# Allegro board MICROMOUSE_SHIELD.brd
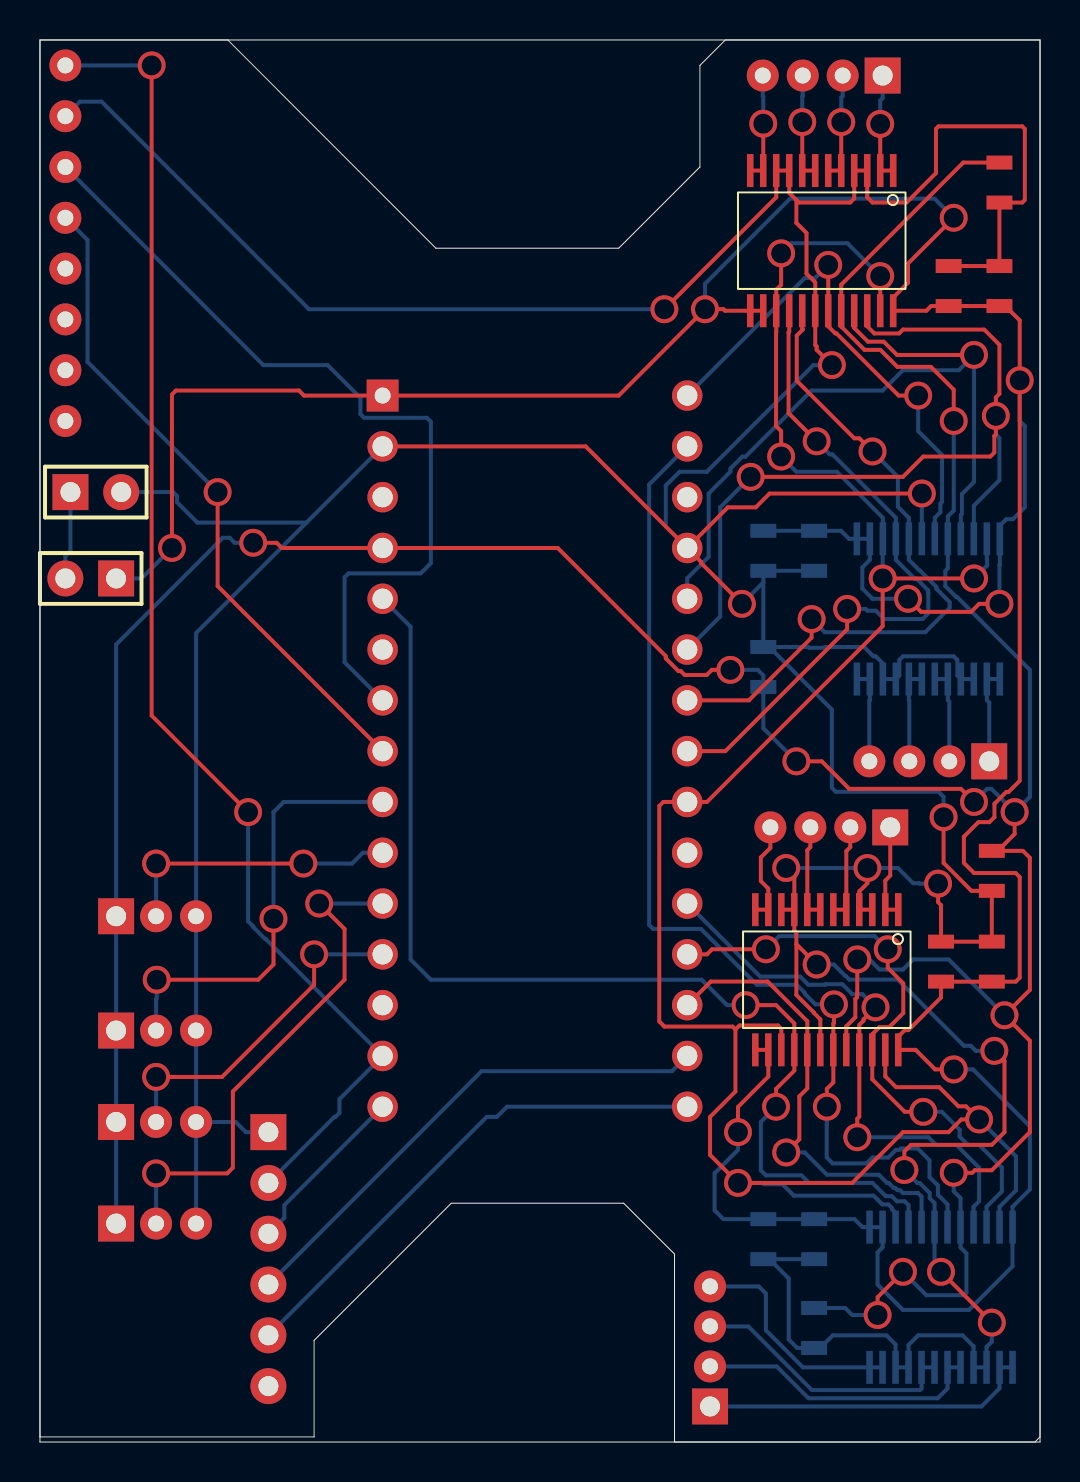
[diagram p0: board, top side]
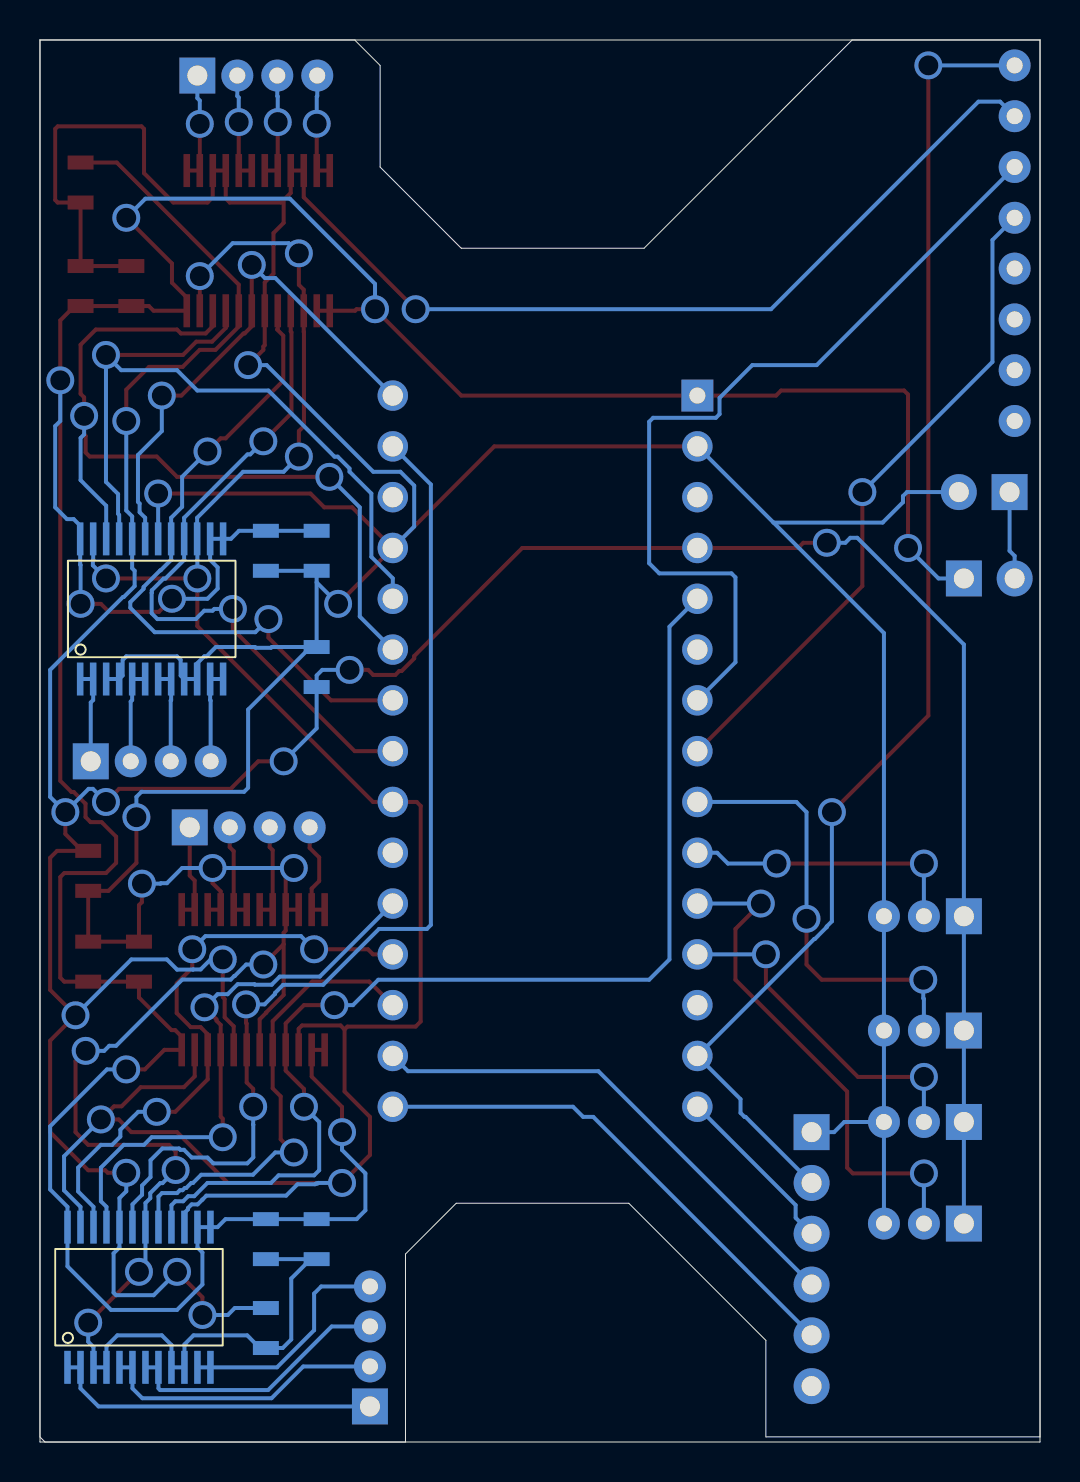
[diagram p1: board, bottom side, seen from below]

Outline 50.04 x 70.1 mm; copper layers: TOP, BOTTOM. Coordinates in mm from the lower left corner of the outline.
Outline path: 0,70.1 0,0.25 13.72,0.25 13.72,5.08 20.57,11.94 29.21,11.94 31.75,9.4 31.75,0 49.78,0 50.04,0.25 50.04,70.1 ; 0,70.1 0,0 50.04,0 50.04,70.1 ; 0,70.1 9.4,70.1 19.81,59.69 28.96,59.69 33.02,63.75 33.02,68.83 34.29,70.1 50.04,70.1 ; 0,70.1 50.04,70.1

## Placement (name value [footprint] x y rotation side)
C1  100n  [0805SMD]  48.01 61.98 90 top
C2  100n  [0805SMD]  48.01 58.8 270 top
C3  10u  [0805SMD]  45.47 58.8 270 top
C4  100n  [0805SMD]  45.08 25.02 270 top
C5  10u  [0805SMD]  47.62 25.02 270 top
C6  100n  [0805SMD]  47.62 27.56 90 top
C7  100n  [0805SMD]  36.19 39.75 270 bottom
C8  100n  [0805SMD]  36.19 43.56 90 bottom
C9  10u  [0805SMD]  38.73 43.56 90 bottom
C10  100n  [0805SMD]  36.19 9.14 90 bottom
C11  10u  [0805SMD]  38.73 9.14 90 bottom
C12  100n  [0805SMD]  38.73 4.7 90 bottom
G1  Gyro  [GYROEB]  1.27 68.83 0 top
J1  -  [CON_1X2]  3.81 43.18 180 top
J2  -  [CON_1X2]  1.52 47.5 0 top
J4  -  [CON_1X4_RM2]  42.16 68.33 180 top
J5  -  [CON_1X4_RM2]  47.5 34.04 180 bottom
J6  -  [CON_1X4_RM2]  42.54 30.73 180 top
J7  -  [CON_1X4_RM2]  33.53 1.78 90 top
J8  -  [CON_1X3_RM2]  3.81 16 0 top
J9  -  [CON_1X3_RM2]  3.81 10.92 0 top
J10  -  [CON_1X3_RM2]  3.81 26.29 0 top
J11  -  [CON_1X3_RM2]  3.81 20.57 0 top
U2  TB6612  [SSOP24]  39.12 60.07 270 top
U4  Nucleo L011K4  [NUCLEO32]  17.14 52.32 0 top
U5  TB6612  [SSOP24]  44.45 41.66 90 bottom
U6  TB6612  [SSOP24]  39.37 23.11 270 top
U7  TB6612  [SSOP24]  45.08 7.24 90 bottom
U8  -  [CON_1X6]  11.43 15.49 270 top

## Library data of the parts
C1-C12 = c: User Part Number: C**
G1 = Gyro: User Part Number: ***
J1 J2 = CON_1X2: User Part Number: ***
J4-J7 = CON_1X4_RM2: User Part Number: ***
J8-J11 = CON_1X3_RM2: User Part Number: ***
U2 U5-U7 = TB6612: Tolerance: ***; User Part Number: ***
U4 = NUCLEO-L011K4
U8 = CON_1X6: User Part Number: ***

## Footprints (pads in the part's own frame, mm; a bottom-side part is the same pattern mirrored in y, then rotated)
0805SMD
  rect 0.7x1.3 smd: 1(0,0) 2(2,0)
CON_1X2
  rect 1.8x1.8 hole 1: 1(0,0)
  round 1.8 hole 1: 2(2.54,0)
CON_1X3_RM2
  rect 1.8x1.8 hole 1: 1(0,0)
  round 1.6 hole 0.8: 2(2,0) 3(4,0)
CON_1X4_RM2
  rect 1.8x1.8 hole 1: 1(0,0)
  round 1.6 hole 0.8: 2(2,0) 3(4,0) 4(6,0)
CON_1X6
  rect 1.8x1.8 hole 1: 1(0,0)
  round 1.8 hole 1: 2(2.54,0) 3(5.08,0) 4(7.62,0) 5(10.16,0) 6(12.7,0)
GYROEB
  round 1.6 hole 0.8: 1(0,0) 2(0,-2.54) 3(0,-5.08) 4(0,-7.62) 5(0,-10.16) 6(0,-12.7) 7(0,-15.24) 8(0,-17.78)
NUCLEO32
  rect 1.6x1.6 hole 0.8: 1(0,0)
  round 1.524 hole 1.016: 2(0,-2.54) 3(0,-5.08) 4(0,-7.62) 5(0,-10.16) 6(0,-12.7) 7(0,-15.24) 8(0,-17.78) 9(0,-20.32) 10(0,-22.86) 11(0,-25.4) 12(0,-27.94) 13(0,-30.48) 14(0,-33.02) 15(0,-35.56) 16(15.24,-35.56) 17(15.24,-33.02) 18(15.24,-30.48) 19(15.24,-27.94) 20(15.24,-25.4) 21(15.24,-22.86) 22(15.24,-20.32) 23(15.24,-17.78) 24(15.24,-15.24) 25(15.24,-12.7) 26(15.24,-10.16) 27(15.24,-7.62) 28(15.24,-5.08) 29(15.24,-2.54) 30(15.24,0)
SSOP24
  rect 1.651x0.33 smd: 1(-3.505,3.576) 2(-3.505,2.926) 3(-3.505,2.276) 4(-3.505,1.626) 5(-3.505,0.975) 6(-3.505,0.325) 7(-3.505,-0.325) 8(-3.505,-0.975) 9(-3.505,-1.626) 10(-3.505,-2.276) 11(-3.505,-2.926) 12(-3.505,-3.576) 13(3.505,-3.576) 14(3.505,-2.926) 15(3.505,-2.276) 16(3.505,-1.626) 17(3.505,-0.975) 18(3.505,-0.325) 19(3.505,0.325) 20(3.505,0.975) 21(3.505,1.626) 22(3.505,2.276) 23(3.505,2.926) 24(3.505,3.576)

## Nets
+3V3: G1.1(VCC) U4.14(+3V3) U8.2
+5V: C1.2 C6.2 C7.2 C12.2 J8.1 J9.1 J10.1 J11.1 U2.20(V20) U4.4(+5V) U5.20(V20) U6.20(V20) U7.20(V20)
GND: C1.1 C2.1 C3.1 C4.1 C5.1 C6.1 C7.1 C8.1 C9.1 C10.1 C11.1 C12.1 G1.2(GND) J2.2 J8.3 J9.3 J10.3 J11.3 U2.3(V3) U2.4(V4) U2.9(V9) U2.10(V10) U2.18(V18) U4.2(GND) U4.27(GND2) U5.3(V3) U5.4(V4) U5.9(V9) U5.10(V10) U5.18(V18) U6.3(V3) U6.4(V4) U6.9(V9) U6.10(V10) U6.18(V18) U7.3(V3) U7.4(V4) U7.9(V9) U7.10(V10) U7.18(V18) U8.1
VIN: C2.2 C3.2 C4.2 C5.2 C8.2 C9.2 C10.2 C11.2 J1.1 U2.13(V13) U2.14(V14) U2.24(V24) U4.1(VIN) U5.13(V13) U5.14(V14) U5.24(V24) U6.13(V13) U6.14(V14) U6.24(V24) U7.13(V13) U7.14(V14) U7.24(V24)
A0: J8.2 U4.12(A0)
A1: J9.2 U4.11(A1)
A2: J10.2 U4.10(A2)
A3: J11.2 U4.9(A3)
A4: G1.4(SDA) U4.8(A4)
A5: G1.3(SCL) U4.7(A5)
A6: U4.6(A6)
A7: U4.5(A7) U6.16(V16) U7.16(V16)
AREF: U4.13(AREF)
D0: U4.29(D0) U6.19(V19) U7.19(V19)
D1: U2.19(V19) U4.30(D1) U5.19(V19)
D2: U2.21(V21) U4.26(D2) U5.21(V21)
D3: U2.22(V22) U4.25(D3) U5.22(V22)
D4: U2.17(V17) U4.24(D4) U5.17(V17)
D5: U2.16(V16) U4.23(D5) U5.16(V16)
D6: U2.15(V15) U2.23(V23) U4.22(D6) U5.15(V15) U5.23(V23) U6.15(V15) U6.23(V23) U7.15(V15) U7.23(V23)
D7: U4.21(D7)
D8: U4.20(D8) U6.21(V21) U7.21(V21)
D9: U4.19(D9) U6.22(V22) U7.22(V22)
D10: U4.18(D10) U6.17(V17) U7.17(V17)
D11: U4.17(D11) U8.4
D12: U4.16(D12) U8.5
D13: U4.15(D13) U8.3
RST: U4.3(RST)
RST2: U4.28(RST2)
N08659: J1.2 J2.1
N17689: J4.1 U2.1(V1) U2.2(V2)
N17721: J4.2 U2.5(V5) U2.6(V6)
N17737: J4.3 U2.7(V7) U2.8(V8)
N17765: J4.4 U2.11(V11) U2.12(V12)
N26053: J5.1 U5.1(V1) U5.2(V2)
N26081: J5.2 U5.5(V5) U5.6(V6)
N26093: J5.3 U5.7(V7) U5.8(V8)
N26117: J5.4 U5.11(V11) U5.12(V12)
N26865: J6.1 U6.1(V1) U6.2(V2)
N26893: J6.2 U6.5(V5) U6.6(V6)
N26905: J6.3 U6.7(V7) U6.8(V8)
N26929: J6.4 U6.11(V11) U6.12(V12)
N27704: J7.1 U7.1(V1) U7.2(V2)
N27732: J7.2 U7.5(V5) U7.6(V6)
N27744: J7.3 U7.7(V7) U7.8(V8)
N27768: J7.4 U7.11(V11) U7.12(V12)

Pads without a net: G1 5 6 7 8; U8 6

## Via types
v1: diameter 1.4, hole 1, TOP to BOTTOM, 73 vias

## Routing (per net, layer and track width the routed paths; a pad name or vN(x,y) marks a point on that pad's centre or on a via; arc(x,y) is an arc through that point)
+3V3: length 67.4
  TOP w0.2: v1(10.41,31.5) 5.59,36.32 v1(5.59,68.83)
  BOTTOM w0.2: G1.1 v1(5.59,68.83) ; U8.2 14.73,16.26 14.79,16.26 14.99,16.46 14.99,17.15 U4.14 11.3,25.15 11.27,25.15 10.67,25.74 10.67,25.78 10.41,26.03 v1(10.41,31.5)
+5V: length 180.5
  TOP w0.2: v1(40.89,24.13) 40.89,22.37 40.89,22.36 40.89,22.24 40.8,22.15 40.8,21.24 40.35,20.79 U6.20 ; 47.92,29.56 48.77,30.4 v1(48.77,31.5) ; 47.92,29.56 49.18,29.56 49.53,29.21 49.53,22.61 v1(48.26,21.34) 49.53,20.07 49.53,15.49 47.62,13.59 46.77,13.59 46.65,13.46 v1(45.72,13.46) ; 47.92,29.56 C6.2 ; v1(46.74,32) 46.08,32.66 40.49,32.66 39.12,34.04 v1(37.85,34.04) ; C1.2 46.2,63.98 40.09,57.87 U2.20 40.09,55.77 41.26,54.61 42.05,54.61 42.9,53.76 44.58,53.76 45.72,52.62 v1(45.72,51.05) ; v1(10.67,44.96) 11.84,44.96 12.1,44.7 U4.4 25.91,44.7 31.31,39.3 31.31,39.18 31.94,38.55 32.06,38.55 32.26,38.35 33.36,38.35 33.62,38.61 v1(34.54,38.61) ; v1(43.18,8.51) 41.91,7.24 v1(41.91,6.35)
  BOTTOM w0.2: v1(34.54,38.61) 35.91,38.61 36.19,38.33 C7.2 36.19,35.69 v1(37.85,34.04) ; v1(10.67,44.96) 9.74,44.96 9.49,45.21 9.14,45.21 3.81,39.88 J10.1 J11.1 J8.1 J9.1 ; C12.2 40.29,6.7 40.64,6.35 v1(41.91,6.35) ; v1(43.18,8.51) 44.35,7.34 46.23,7.34 46.35,7.47 46.35,9.43 46.06,9.73 U7.20 46.06,12.19 45.72,12.53 v1(45.72,13.46) ; v1(46.74,32) 47.39,32.66 47.6,32.66 v1(48.77,31.5) 49.53,32.26 49.53,38.61 45.89,42.25 45.84,42.25 45.3,42.8 45.3,43.56 45.43,43.69 U5.20 45.43,46.28 45.72,46.58 v1(45.72,51.05) ; v1(40.89,24.13) 41.5,24.13 42,23.63 42.37,23.63 42.38,23.62 43.18,23.62 43.69,24.13 45.47,24.13 v1(48.26,21.34)
GND: length 317.7
  TOP w0.2: U6.18 39.04,21.14 38.72,21.46 38.72,21.48 37.85,22.35 37.85,24.89 ; v1(31.24,56.64) 36.84,62.24 U2.10 U2.9 37.49,62.46 37.85,62.1 ; U4.27 34.42,46.74 35.81,46.74 36.5,47.43 v1(44.12,47.43) ; U4.27 33.08,44 33.08,43.95 v1(35.12,41.91) ; U4.27 27.3,49.78 U4.2 ; v1(47.75,19.56) 48.26,19.05 48.26,15.49 47.62,14.86 43.58,14.86 43.25,14.53 v1(43.25,13.6) ; v1(41.4,28.7) 41.4,27.94 41,27.53 U6.4 U6.3 ; v1(45.08,8.51) v1(47.62,5.97) ; v1(45.21,31.24) 45.21,28.96 46.61,27.56 C6.1 C5.1 C4.1 45.08,26.84 44.94,26.99 v1(44.94,27.92) ; U6.9 37.74,28.3 v1(37.34,28.7) ; U6.9 37.74,25.57 37.85,25.47 37.85,24.89 ; U6.9 U6.10 ; 37.85,62.1 37.97,61.98 40.54,61.98 40.74,62.18 U2.4 U2.3 41.39,62.24 41.66,61.98 43.36,61.98 44.83,63.44 44.83,65.66 44.96,65.79 49.15,65.79 49.28,65.66 49.28,62.1 49.15,61.98 C1.1 C2.1 C3.1 ; 37.85,62.1 37.85,60.96 38.35,60.45 38.35,58.42 38.79,57.98 U2.18 38.79,54.85 38.86,54.78 38.86,54.61 v1(39.62,53.85) ; 37.85,24.89 v1(38.86,23.88)
  BOTTOM w0.2: 13.33,45.97 U4.2 ; 13.33,45.97 7.87,45.97 6.86,46.99 6.86,47.3 6.66,47.5 J2.2 ; 13.33,45.97 7.81,40.45 J10.3 J11.3 J8.3 ; v1(31.24,56.64) 13.46,56.64 3.08,67.02 2,67.02 G1.2 ; U5.3 U5.4 45.9,38.33 45.9,39.1 45.72,39.29 43.18,39.29 43,39.1 43,38.33 U5.9 U5.10 42.17,38.93 41.82,39.29 41.7,39.29 41.24,39.75 39.28,39.75 39.25,39.71 38.48,39.71 38.44,39.75 36.49,39.75 ; J8.3 9.79,16 10.3,15.49 U8.1 ; J8.3 J9.3 ; v1(45.08,8.51) 44.76,8.83 U7.18 44.76,11.95 44.52,12.19 44.52,12.45 44.02,12.94 43.91,12.94 v1(43.25,13.6) ; 35.89,39.75 C7.1 ; C7.1 36.19,42.98 ; C7.1 36.49,39.75 ; U5.18 v1(44.12,47.43) ; C10.1 36.49,9.14 ; 36.49,9.14 C11.1 ; 36.49,9.14 37.47,8.17 37.47,5.13 37.89,4.7 C12.1 39.03,4.7 39.67,5.33 42.35,5.33 42.81,4.88 U7.10 U7.9 43.46,4.85 43.94,5.33 46.16,5.33 46.71,4.79 U7.4 U7.3 47.36,4.75 47.62,5.01 v1(47.62,5.97) ; v1(47.75,19.56) 46.82,19.56 46.57,19.81 46.23,19.81 42.92,23.12 40.5,23.12 40.32,23.3 40.29,23.3 39.72,23.88 v1(38.86,23.88) ; 36.19,42.98 C8.1 C9.1 ; 36.19,42.98 v1(35.12,41.91) ; v1(45.21,31.24) 45.21,32.26 44.96,32.51 39.82,32.51 39.62,32.71 39.62,36.62 36.49,39.75 ; v1(44.94,27.92) 44.01,27.92 43.99,27.94 43.69,27.94 42.93,28.7 v1(41.4,28.7) v1(37.34,28.7) ; U4.27 31.31,45.78 31.31,47.82 32,48.51 33.36,48.51 38.7,53.85 v1(39.62,53.85)
VIN: length 189.3
  TOP w0.2: U2.14 U2.13 34.28,56.57 34.2,56.64 v1(33.27,56.64) 28.96,52.32 U4.1 13.21,52.32 12.95,52.58 6.8,52.58 6.6,52.38 v1(6.6,44.7) ; U6.13 U6.14 36.44,18.27 34.92,16.75 v1(34.92,15.49) ; v1(45.72,18.63) 44.79,18.63 43.82,19.61 U6.24 42.95,20.27 43.27,20.59 43.45,20.59 45.08,22.23 C4.2 C5.2 48.82,23.02 49.02,23.22 49.02,28.25 48.82,28.45 46.74,28.45 46.23,28.96 46.23,30.27 46.95,30.99 47.5,30.99 47.76,31.25 47.76,31.91 48.35,32.51 48.47,32.51 49.02,33.06 v1(49.02,53.09) 49.02,56.09 48.31,56.8 C2.2 C3.2 44.59,56.8 44.35,56.57 U2.24 42.69,57.23 43.43,57.97 43.43,58.93 v1(45.72,61.21) ; v1(43.43,42.16) 44.09,41.51 46.59,41.51 46.99,41.91 v1(48.01,41.91)
  BOTTOM w0.2: v1(6.6,44.7) 5.08,43.18 J1.1 ; v1(45.72,18.63) 46.69,18.63 49.53,15.79 49.53,12.63 48.66,11.76 U7.24 48.66,8.78 46.48,6.6 43.18,6.6 41.91,7.87 41.91,9.48 42.16,9.73 U7.14 U7.13 41.15,10.74 40.75,11.14 C11.2 C10.2 34.2,11.14 33.76,11.58 33.76,13.43 34.92,14.6 v1(34.92,15.49) ; v1(33.27,56.64) 33.27,57.91 37.53,62.17 44.76,62.17 v1(45.72,61.21) ; C8.2 C9.2 40.08,45.56 40.48,45.16 U5.13 U5.14 41.52,44.11 41.15,43.73 41.15,42.67 41.66,42.16 v1(43.43,42.16) ; v1(48.01,41.91) 48.01,43.85 48.03,43.87 U5.24 48.03,45.82 48.35,46.15 48.69,46.15 49.28,46.74 49.28,50.8 49.02,51.05 v1(49.02,53.09)
A0: length 17
  TOP w0.2: v1(13.72,24.38) 13.72,22.86 9.11,18.26 v1(5.81,18.26)
  BOTTOM w0.2: U4.12 v1(13.72,24.38) ; J8.2 v1(5.81,18.26)
A1: length 25.7
  TOP w0.2: v1(5.81,13.43) 9.37,13.43 9.65,13.72 9.65,17.53 15.24,23.11 15.24,25.65 v1(13.97,26.92)
  BOTTOM w0.2: J9.2 v1(5.81,13.43) ; v1(13.97,26.92) U4.11
A2: length 14.2
  TOP w0.2: v1(5.81,28.92) v1(13.18,28.92)
  BOTTOM w0.2: J10.2 v1(5.81,28.92) ; U4.10 16.16,29.46 15.62,28.92 v1(13.18,28.92)
A3: length 22
  TOP w0.2: v1(5.84,23.11) 10.92,23.11 11.68,23.88 v1(11.68,26.16)
  BOTTOM w0.2: J11.2 5.81,22.16 5.84,22.19 v1(5.84,23.11) ; v1(11.68,26.16) 11.68,31.5 12.19,32 U4.9
A4: length 33.2
  TOP w0.2: v1(8.89,47.5) 8.89,42.8 U4.8
  BOTTOM w0.2: G1.4 2.38,60.1 2.38,54.01 v1(8.89,47.5)
A5: length 42.7
  BOTTOM w0.2: G1.3 11.18,53.85 14.39,53.85 16.03,52.21 16.03,51.4 16.22,51.21 19.36,51.21 19.56,51.01 19.56,43.94 19.05,43.43 15.44,43.43 15.24,43.23 15.24,38.99 U4.7
A7: length 56.4
  TOP w0.2: v1(35.31,21.84) 36.83,21.84 37.74,20.93 U6.16 37.74,18.57 36.83,17.65 v1(36.83,16.76)
  BOTTOM w0.2: v1(35.31,21.84) 34.38,21.84 33.11,23.11 19.56,23.11 18.54,24.13 18.54,40.77 U4.5 ; v1(36.83,16.76) 36.07,16 36.07,13.59 36.32,13.33 38.1,13.33 38.48,12.95 41.66,12.95 42.32,12.29 42.62,12.29 42.88,12.04 43.27,12.04 43.46,11.84 U7.16
D0: length 53
  TOP w0.2: v1(39.37,16.76) 39.37,17.65 39.7,17.98 U6.19 39.7,20.92 39.73,20.96 v1(39.73,21.88)
  BOTTOM w0.2: U7.19 45.41,11.88 44.93,12.36 44.93,12.82 44.51,13.25 44.51,14.09 43.92,14.68 43.08,14.68 43.01,14.61 42.83,14.61 42.45,14.22 41.66,14.22 41.36,13.93 39.66,13.93 39.36,14.23 39.36,15.87 39.37,15.87 v1(39.37,16.76) ; U4.29 30.48,47.88 30.48,25.85 30.68,25.65 33.08,25.65 35.87,22.86 37.87,22.86 38.27,22.46 38.27,22.41 38.8,21.88 v1(39.73,21.88)
D1: length 26.6
  TOP w0.2: v1(39.44,58.86) U2.19 39.44,55.79 39.8,55.43 39.86,55.43 42.96,52.32 v1(43.94,52.32)
  BOTTOM w0.2: v1(43.94,52.32) 43.94,50.55 45.13,49.35 45.13,47.01 45.05,46.93 45.05,46.49 44.78,46.21 U5.19 ; U4.30 38.26,58.2 38.79,58.2 v1(39.44,58.86)
D2: length 38.8
  TOP w0.2: v1(46.74,54.36) 42.88,54.36 42.22,55.02 41.43,55.02 40.74,55.7 U2.21
  BOTTOM w0.2: U4.26 32.38,43.19 33.46,44.26 33.46,47.43 34.55,48.52 34.55,48.68 35.14,49.27 35.3,49.27 38.61,52.58 42.16,52.58 43.18,53.59 45.97,53.59 v1(46.74,54.36) 46.74,48.01 46.13,47.4 46.13,46.41 46.08,46.35 U5.21
D3: length 42.8
  TOP w0.2: U2.22 41.39,55.79 41.75,55.43 42.99,55.43 43.18,55.63 47.24,55.63 48.01,54.86 48.01,52.41 47.83,52.24 v1(47.83,51.31) 47.83,50.38 47.75,50.31 47.75,49.48 47.55,49.28 44.2,49.28 43.18,48.26 v1(35.56,48.26)
  BOTTOM w0.2: v1(47.83,51.31) 47.83,50.38 48.01,50.2 48.01,48.09 46.73,46.81 U5.22 ; v1(35.56,48.26) 34.04,46.74 34.04,41.28 U4.25
D4: length 34.5
  TOP w0.2: v1(41.66,49.53) 41,50.19 40.75,50.19 37.86,53.07 37.86,55.32 38.17,55.63 38.14,55.66 U2.17 ; v1(38.61,41.15) 38.61,40.22 35.47,37.08 U4.24
  BOTTOM w0.2: v1(41.66,49.53) 42.93,48.26 42.93,46.76 43.47,46.21 U5.17 43.47,44.11 44,43.58 44.02,43.58 44.85,42.75 44.85,42.66 45.52,42 45.52,41.71 44.3,40.49 39.26,40.49 v1(38.61,41.15)
D5: length 34.1
  TOP w0.2: U2.16 37.49,55.53 37.45,55.49 37.45,51.45 v1(38.86,50.04) ; v1(40.39,41.66) 40.39,40.64 34.29,34.54 U4.23
  BOTTOM w0.2: v1(40.39,41.66) 41.31,41.66 41.4,41.57 41.82,41.57 42.24,41.15 44.16,41.15 44.45,41.44 44.45,42.46 44.44,42.47 44.44,42.58 43.85,43.17 43.76,43.17 42.82,44.11 U5.16 42.82,46.21 39.66,49.38 39.52,49.38 v1(38.86,50.04)
D6: length 114.5
  TOP w0.2: v1(46.74,43.18) v1(42.16,43.18) 42.16,40.79 33.37,32 U4.22 31.19,32 30.99,31.8 30.99,21.03 31.24,20.77 34.65,20.77 34.8,20.63 ; U6.15 37.09,20.66 36.93,20.83 35,20.83 34.8,20.63 ; U6.23 42.3,18.28 42.84,17.74 45,17.74 45.95,16.78 46.33,16.78 v1(46.99,16.13) 46.1,16.13 45.46,15.49 43.18,15.49 40.64,12.95 v1(34.92,12.95) 33.53,14.35 33.53,16.26 34.8,17.53 34.8,20.63 ; v1(37.08,59.44) 37.08,57.86 36.84,57.62 U2.15 36.84,55.51 36.83,55.5 36.83,50.8 37.08,50.55 v1(37.08,49.28) ; U2.23 v1(42.04,58.3)
  BOTTOM w0.2: v1(42.04,58.3) 40.4,59.94 37.59,59.94 v1(37.08,59.44) ; U7.23 48.01,11.76 48.83,12.58 48.83,14.29 v1(46.99,16.13) ; v1(46.74,43.18) 47.39,43.84 47.39,44.09 47.38,44.11 U5.23 ; v1(42.16,43.18) 42.16,45.15 U5.15 42.17,46.21 39.87,48.51 37.85,48.51 v1(37.08,49.28) ; v1(34.92,12.95) 36.12,12.95 36.15,12.92 36.24,12.92 36.28,12.89 37.15,12.89 37.72,12.32 41.71,12.32 41.91,12.12 42.15,11.88 42.45,11.88 42.63,11.7 42.63,11.63 42.81,11.46 U7.15
D8: length 28.3
  TOP w0.2: v1(41.81,21.74) 41.21,21.14 41.21,21.07 41,20.86 U6.21 41,16.27 40.89,16.17 v1(40.89,15.24)
  BOTTOM w0.2: v1(40.89,15.24) 44.45,15.24 44.83,14.86 45.85,14.86 46.99,13.72 46.99,12.04 46.71,11.76 U7.21 ; U4.20 36.04,23.27 38.04,23.27 38.44,22.87 39.28,22.87 39.31,22.89 40.15,22.89 40.65,22.39 41.15,22.39 v1(41.81,21.74)
D9: length 30.2
  TOP w0.2: U4.19 33.37,24.38 33.63,24.64 v1(36.32,24.64) ; v1(44.2,16.51) 43.27,16.51 41.65,18.13 U6.22 41.65,20.39 42,20.74 42.49,20.74 43.2,21.45 43.2,22.93 42.42,23.71 v1(42.42,24.64)
  BOTTOM w0.2: v1(44.2,16.51) 45.12,16.51 46.02,15.62 46.02,15.27 46.43,14.86 46.99,14.86 48.13,13.72 48.13,12.53 47.36,11.76 U7.22 ; v1(36.32,24.64) 36.98,25.29 41.76,25.29 v1(42.42,24.64)
D10: length 23.5
  TOP w0.2: U4.18 33.57,23.03 36.41,23.03 38.39,21.04 U6.17 38.39,17.68 37.99,17.28 37.99,15.13 v1(37.34,14.48)
  BOTTOM w0.2: U7.17 44.11,12.27 43.94,12.45 43.18,12.45 43.04,12.59 42.9,12.59 42.79,12.7 42.72,12.7 42.47,12.95 42.38,12.95 41.97,13.36 39.38,13.36 38.26,14.48 v1(37.34,14.48)
D11: length 25.7
  BOTTOM w0.2: U8.4 22.1,18.54 31.62,18.54 U4.17
D12: length 25.7
  BOTTOM w0.2: U4.16 23.37,16.76 22.86,16.26 22.35,16.26 U8.5
D13: length 8.7
  BOTTOM w0.2: U8.3 12.23,11.21 12.23,11.85 U4.15
N08659: length 4.4
  BOTTOM w0.2: J1.2 1.27,44.31 1.52,44.56 J2.1
N17689: length 5.5
  TOP w0.2: v1(42.04,65.91) U2.2 U2.1
  BOTTOM w0.2: J4.1 42.16,67.2 42.04,67.08 v1(42.04,65.91)
N17721: length 5.4
  TOP w0.2: U2.6 U2.5 v1(40.09,66)
  BOTTOM w0.2: v1(40.09,66) 40.09,67.23 40.16,67.3 J4.2
N17737: length 5.4
  TOP w0.2: U2.7 U2.8 v1(38.14,66)
  BOTTOM w0.2: J4.3 38.16,67.3 38.14,67.28 v1(38.14,66)
N17765: length 5.4
  TOP w0.2: U2.12 U2.11 v1(36.19,65.92)
  BOTTOM w0.2: J4.4 36.16,67.3 36.19,67.27 v1(36.19,65.92)
N26053: length 4.8
  BOTTOM w0.2: U5.1 U5.2 47.38,37.1 47.5,36.98 J5.1
N26081: length 4.8
  BOTTOM w0.2: U5.6 U5.5 45.43,37.1 45.5,37.03 J5.2
N26093: length 4.8
  BOTTOM w0.2: U5.7 U5.8 43.47,37.1 43.5,37.07 J5.3
N26117: length 4.8
  BOTTOM w0.2: U5.12 U5.11 41.52,37.1 41.5,37.07 J5.4
N26865: length 4.9
  TOP w0.2: J6.1 42.54,28.32 42.3,28.07 U6.2 U6.1
N26893: length 4.8
  TOP w0.2: U6.6 U6.5 40.35,29.54 40.54,29.74 J6.2
N26905: length 4.8
  TOP w0.2: J6.3 38.54,29.74 38.39,29.59 U6.8 U6.7
N26929: length 5.1
  TOP w0.2: U6.12 U6.11 36.44,27.67 36.07,28.05 36.07,29.23 36.54,29.71 J6.4
N27704: length 16.6
  BOTTOM w0.2: J7.1 47.11,1.78 48.01,2.68 U7.2 U7.1
N27732: length 14.4
  BOTTOM w0.2: U7.5 U7.6 45.41,2.68 44.92,2.19 38.45,2.19 36.86,3.78 J7.2
N27744: length 13.6
  BOTTOM w0.2: J7.3 35.44,5.78 38.62,2.6 44.03,2.6 44.11,2.68 U7.8 U7.7
N27768: length 11.4
  BOTTOM w0.2: U7.11 U7.12 38.18,3.73 36.32,5.59 36.32,7.42 35.96,7.78 J7.4

## Text on the board
XSECTION_CHART: *  SURFACE - AIR 0 MM | L1: TOP CONDUCTOR - COPPER 0.0305 MM | *  DIELECTRIC - FR-4 0.2032 MM | L2: BOTTOM CONDUCTOR - COPPER 0.0305 MM | DESIGN CROSS SECTION CHART | ___________________________ | TOTAL THICKNESS 0.2642 MM | 1-2 | FIGURE | SIZE | 0.8001 | 1.0 | 1.016 | DRILL CHART: TOP to BOTTOM | ALL UNITS ARE IN MILLIMETERS | PLATED | QTY | 29 | 73 | 18
